# Altium PCB NIXIEclock未铺地.PcbDoc (part 1 of 2)
Units mil, origin at the board's own origin, x right, y up, seen from the top; angles counter-clockwise.
Board outline 8475 x 2960 mil, 2 copper layers (Top Layer, Bottom Layer); 232 components, 292 nets, 854 pads, 200 vias.
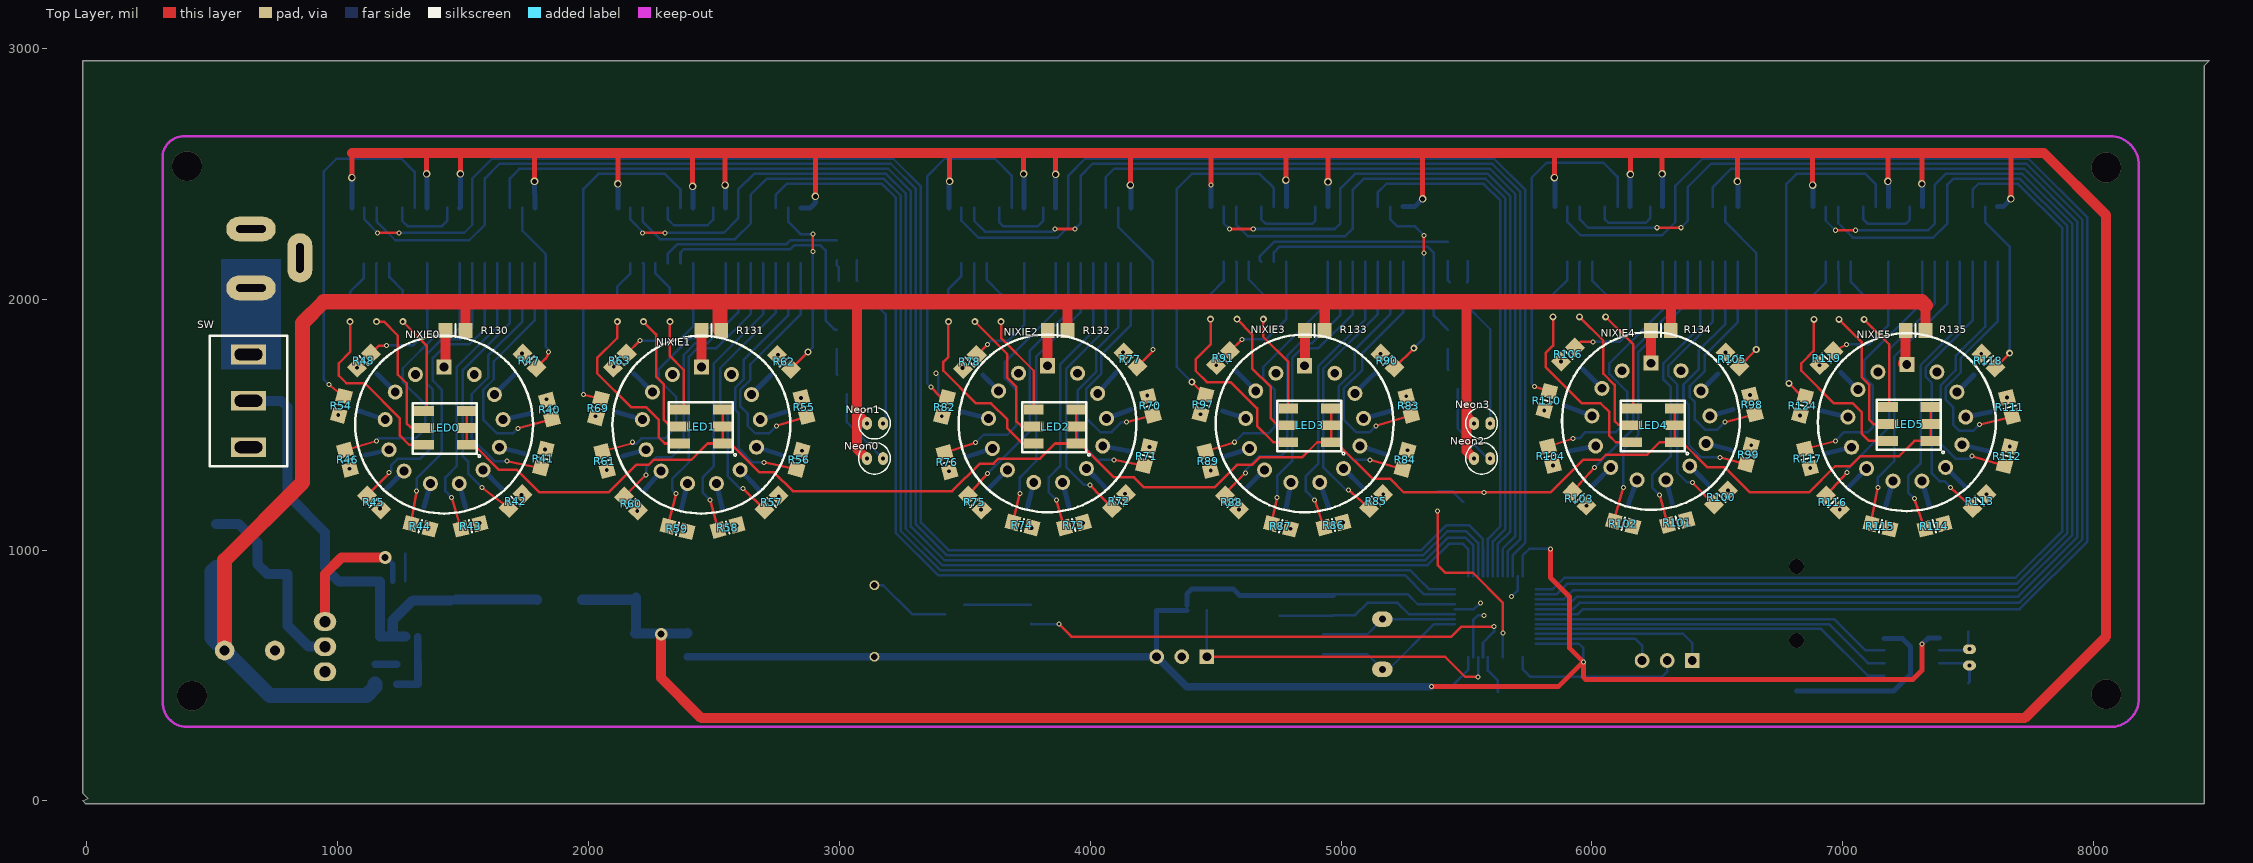
[diagram p0: Top Layer view]
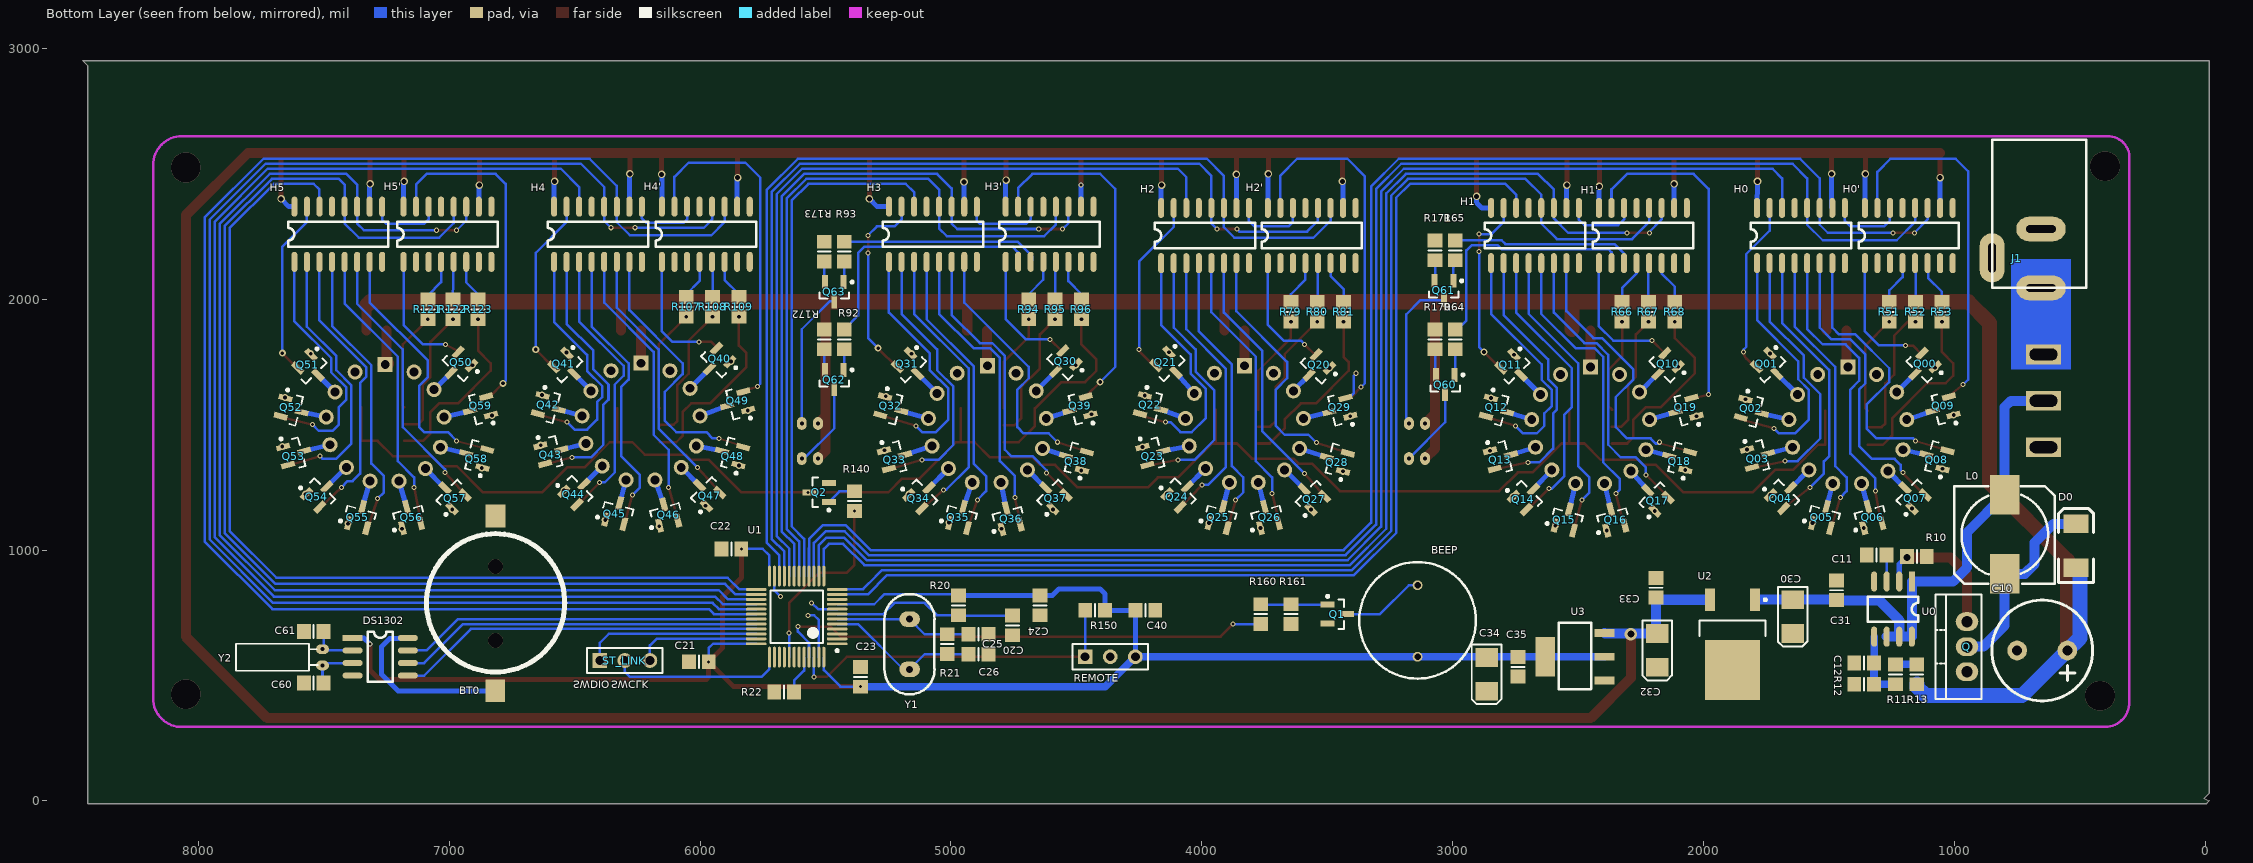
[diagram p1: Bottom Layer view, seen from below]

## Layer stack, top to bottom
Top Layer: signal copper 1.4
Dielectric: dielectric 12.6, FR-4, Dk 4.8
Bottom Layer: signal copper 1.4

## Board outline
-15,0 -5,-10 8440,-10 8440,2930 8460,2950 -15,2950 -15,30 -5,20 5,10

## Design rules (kind name [scope] priority, off if disabled: settings)
Clearance [All] p1: gap=10
ComponentClearance [All] p1: gap=0 collisioncheckmode=3 verticalgap=0 showdistances=FALSE
HoleSize [All] p1: absolutevalues=TRUE maxlimit=200 minlimit=1 maxpercent=80.000 minpercent=20.000
NetAntennae [All] p1: netantennaetolerance=10
PolygonConnect [All] p1: connectstyle=Relief reliefconductorwidth=10 reliefentries=4 polygonreliefangle="90 Angle" airgapwidth=10
RoutingVias [All] p1: holewidth=15 width=30 viastyle="Through Hole" minholewidth=10 minwidth=20 maxholewidth=28 maxwidth=50
SilkToSilkClearance [All] p1: silktosilkclearance=0
SilkToSolderMaskClearance [IsPad] p1: minsilkscreentomaskgap=0 clearancetoexposedcopper=TRUE
SolderMaskExpansion [All] p1: expansion=4
Width [All] p1: maxlimit=100 minlimit=10 preferedwidth=10
23 further rules are at their usual default settings.

## Components (designator, comment, footprint, x,y, rotation, side; value= is the part's Value field where it differs from the comment)
BEEP "Speaker" didi 3140,720 r90 bottom
BT0 "Battery" CR1220 6815,640 r90 bottom
C10 "250V" 1000UF 550,600 r0 bottom
C11 "Cap" 0805_M 1310,980 r0 bottom
C12 "Cap" 0805_M 1360,550 r180 bottom
C20 "Cap Semi" 0805_M 4755,700 r90 bottom
C21 "Cap Semi" 0805_M 6005,555 r180 bottom
C22 "Cap Semi" 0805_M 5875,1005 r180 bottom
C23 "Cap Semi" 0805_M 5360,495 r270 bottom
C24 "Cap Semi" 0805_M 4645,780 r90 bottom
C25 "CAP" 0805_M 4890,665 r0 bottom
C26 "CAP" 0805_M 4890,585 r0 bottom
C30 "Cap Pol1" 3528 1645,735 r270 bottom
C31 "104" 0805_M 1470,840 r270 bottom
C32 "Cap Pol1" 3528 2185,600 r270 bottom
C33 "Cap Semi" 0805_M 2190,850 r270 bottom
C34 "Cap Pol1" 3528 2865,505 r270 bottom
C35 "Cap Semi" 0805_M 2740,535 r90 bottom
C40 "Cap" 0805_M 4225,760 r0 bottom
C60 "Cap" 0805_M 7540,470 r0 bottom
C61 "Cap" 0805_M 7540,675 r0 bottom
D0 "SS14" 7227 515,930 r90 bottom
DS1302 "DS1302" SO-8 7385,650 r180 bottom
H0 "74HC595" SO-16 1615,2130 r90 bottom
H0' "74HC595" SO-16 1185,2130 r90 bottom
H1 "74HC595" SO-16 2675,2130 r90 bottom
H1' "74HC595" SO-16 2245,2130 r90 bottom
H2 "74HC595" SO-16 3990,2130 r90 bottom
H2' "74HC595" SO-16 3565,2130 r90 bottom
H3 "74HC595" SO-16 5075,2135 r90 bottom
H3' "74HC595" SO-16 4610,2135 r90 bottom
H4 "74HC595" SO-16 6410,2135 r90 bottom
H4' "74HC595" SO-16 5980,2135 r90 bottom
H5 "74HC595" SO-16 7445,2135 r90 bottom
H5' "74HC595" SO-16 7010,2135 r90 bottom
J1 "JK" POWER 475,2635 r0 bottom
L0 "L" L101 795,1055 r90 bottom
LED0 "LED.RGB" 5050LED 1335,1385 r0 top
LED1 "LED.RGB" 5050LED 2355,1390 r0 top
LED2 "LED.RGB" 5050LED 3765,1390 r0 top
LED3 "LED.RGB" 5050LED 4780,1395 r0 top
LED4 "LED.RGB" 5050LED 6150,1395 r0 top
LED5 "LED.RGB" 5050LED 7170,1400 r0 top
Neon0 "Neon" NEON 3110,1365 r270 top
Neon1 "Neon" NEON 3110,1505 r270 top
Neon2 "Neon" NEON 5530,1365 r270 top
Neon3 "Neon" NEON 5530,1505 r270 top
NIXIE0 "IN14" IN14 1425,1495 r0 top
NIXIE1 "IN14" IN14 2450,1495 r0 top
NIXIE2 "IN14" IN14 3830,1500 r0 top
NIXIE3 "IN14" IN14 4855,1500 r0 top
NIXIE4 "IN14" IN14 6235,1510 r0 top
NIXIE5 "IN14" IN14 7255,1505 r0 top
Q "IRF630" TO-220 950,615 r90 bottom
Q00 "A42" A42 1130,1730 r315 bottom
Q01 "A42" A42 1735,1730 r225 bottom
Q1 "QNPN" A42 3460,745 r180 bottom
Q02 "A42" A42 1805,1555 r195 bottom
Q2 "QNPN" A42 5525,1230 r0 bottom
Q03 "A42" A42 1780,1375 r165 bottom
Q04 "A42" A42 1680,1220 r135 bottom
Q05 "A42" A42 1520,1135 r105 bottom
Q06 "A42" A42 1335,1135 r75 bottom
Q07 "A42" A42 1170,1220 r45 bottom
Q08 "A42" A42 1075,1370 r15 bottom
Q09 "A42" A42 1050,1565 r345 bottom
Q10 "A42" A42 2155,1730 r315 bottom
Q11 "A42" A42 2755,1725 r225 bottom
Q12 "A42" A42 2820,1560 r195 bottom
Q13 "A42" A42 2805,1370 r165 bottom
Q14 "A42" A42 2705,1215 r135 bottom
Q15 "A42" A42 2545,1125 r105 bottom
Q16 "A42" A42 2360,1125 r75 bottom
Q17 "A42" A42 2195,1210 r45 bottom
Q18 "A42" A42 2100,1365 r15 bottom
Q19 "A42" A42 2075,1560 r345 bottom
Q20 "A42" A42 3545,1725 r315 bottom
Q21 "A42" A42 4130,1735 r225 bottom
Q22 "A42" A42 4200,1570 r195 bottom
Q23 "A42" A42 4190,1385 r165 bottom
Q24 "A42" A42 4085,1225 r135 bottom
Q25 "A42" A42 3925,1135 r105 bottom
Q26 "A42" A42 3740,1135 r75 bottom
Q27 "A42" A42 3565,1215 r45 bottom
Q28 "A42" A42 3465,1360 r15 bottom
Q29 "A42" A42 3455,1560 r345 bottom
Q30 "A42" A42 4555,1740 r315 bottom
Q31 "A42" A42 5160,1730 r225 bottom
Q32 "A42" A42 5235,1565 r195 bottom
Q33 "A42" A42 5220,1370 r165 bottom
Q34 "A42" A42 5115,1220 r135 bottom
Q35 "A42" A42 4960,1135 r105 bottom
Q36 "A42" A42 4770,1130 r75 bottom
Q37 "A42" A42 4595,1220 r45 bottom
Q38 "A42" A42 4505,1365 r15 bottom
Q39 "A42" A42 4490,1565 r345 bottom
Q40 "A42" A42 5935,1750 r315 bottom
Q41 "A42" A42 6530,1730 r225 bottom
Q42 "A42" A42 6600,1570 r195 bottom
Q43 "A42" A42 6590,1390 r165 bottom
Q44 "A42" A42 6490,1235 r135 bottom
Q45 "A42" A42 6330,1150 r105 bottom
Q46 "A42" A42 6135,1145 r75 bottom
Q47 "A42" A42 5975,1230 r45 bottom
Q48 "A42" A42 5875,1385 r15 bottom
Q49 "A42" A42 5855,1585 r345 bottom
Q50 "A42" A42 6965,1735 r315 bottom
Q51 "A42" A42 7550,1725 r225 bottom
Q52 "A42" A42 7625,1560 r195 bottom
Q53 "A42" A42 7615,1385 r165 bottom
Q54 "A42" A42 7515,1225 r135 bottom
Q55 "A42" A42 7355,1135 r105 bottom
Q56 "A42" A42 7160,1135 r75 bottom
Q57 "A42" A42 6990,1220 r45 bottom
Q58 "A42" A42 6895,1375 r15 bottom
Q59 "A42" A42 6880,1565 r345 bottom
Q60 "A42" A42 3030,1660 r270 bottom
Q61 "A42" A42 3035,2035 r270 bottom
Q62 "A42" A42 5465,1680 r270 bottom
Q63 "A42" A42 5465,2030 r270 bottom
R10 "Res1" 0805_M 1150,975 r0 bottom
R11 "Res1" 0805_M 1235,505 r90 bottom
R12 "2K" 0805_M 1360,465 r180 bottom
R13 "Res1" 0805_M 1150,505 r270 bottom
R20 "Res2" 0805_M 4970,780 r270 bottom
R21 "RES" 0805_M 5015,625 r90 bottom
R22 "Res2" 0805_M 5665,435 r0 bottom
R40 "Res1" 0805_M 1845,1560 r105 top
R41 "Res1" 0805_M 1820,1365 r75 top
R42 "Res1" 0805_M 1710,1195 r45 top
R43 "Res1" 0805_M 1530,1095 r15 top
R44 "Res1" 0805_M 1330,1095 r345 top
R45 "Res1" 0805_M 1145,1190 r315 top
R46 "Res1" 0805_M 1040,1360 r285 top
R47 "Res1" 0805_M 1765,1755 r315 top
R48 "Res1" 0805_M 1105,1755 r225 top
R51 "Res1" 0805_M 1260,1950 r270 bottom
R52 "Res1" 0805_M 1155,1950 r270 bottom
R53 "Res1" 0805_M 1050,1950 r270 bottom
R54 "Res1" 0805_M 1015,1575 r75 top
R55 "Res1" 0805_M 2860,1570 r105 top
R56 "Res1" 0805_M 2840,1360 r75 top
R57 "Res1" 0805_M 2730,1190 r45 top
R58 "Res1" 0805_M 2555,1090 r15 top
R59 "Res1" 0805_M 2355,1085 r345 top
R60 "Res1" 0805_M 2170,1185 r315 top
R61 "Res1" 0805_M 2065,1355 r285 top
R62 "Res1" 0805_M 2780,1750 r315 top
R63 "Res1" 0805_M 2125,1755 r225 top
R64 "Res1" 0805_M 2990,1840 r270 bottom
R65 "Res1" 0805_M 2990,2195 r270 bottom
R66 "Res1" 0805_M 2325,1950 r270 bottom
R67 "Res1" 0805_M 2220,1950 r270 bottom
R68 "Res1" 0805_M 2115,1950 r270 bottom
R69 "Res1" 0805_M 2040,1565 r75 top
R70 "Res1" 0805_M 4240,1575 r105 top
R71 "Res1" 0805_M 4225,1375 r75 top
R72 "Res1" 0805_M 4115,1195 r45 top
R73 "Res1" 0805_M 3935,1100 r15 top
R74 "Res1" 0805_M 3730,1100 r345 top
R75 "Res1" 0805_M 3540,1190 r315 top
R76 "Res1" 0805_M 3430,1350 r285 top
R77 "Res1" 0805_M 4160,1760 r315 top
R78 "Res1" 0805_M 3520,1750 r225 top
R79 "Res1" 0805_M 3645,1950 r270 bottom
R80 "Res1" 0805_M 3540,1950 r270 bottom
R81 "Res1" 0805_M 3435,1950 r270 bottom
R82 "Res1" 0805_M 3420,1570 r75 top
R83 "Res1" 0805_M 5270,1575 r105 top
R84 "Res1" 0805_M 5255,1360 r75 top
R85 "Res1" 0805_M 5140,1195 r45 top
R86 "Res1" 0805_M 4970,1100 r15 top
R87 "Res1" 0805_M 4760,1095 r345 top
R88 "Res1" 0805_M 4565,1190 r315 top
R89 "Res1" 0805_M 4470,1355 r285 top
R90 "Res1" 0805_M 5185,1755 r315 top
R91 "Res1" 0805_M 4530,1765 r225 top
R92 "Res1" 0805_M 5425,1840 r270 bottom
R93 "Res1" 0805_M 5425,2190 r270 bottom
R94 "Res1" 0805_M 4690,1960 r270 bottom
R95 "Res1" 0805_M 4585,1960 r270 bottom
R96 "Res1" 0805_M 4480,1960 r270 bottom
R97 "Res1" 0805_M 4450,1580 r75 top
R98 "Res1" 0805_M 6640,1580 r105 top
R99 "Res1" 0805_M 6625,1380 r75 top
R100 "Res1" 0805_M 6515,1210 r45 top
R101 "Res1" 0805_M 6340,1110 r15 top
R102 "Res1" 0805_M 6125,1105 r345 top
R103 "Res1" 0805_M 5950,1205 r315 top
R104 "Res1" 0805_M 5835,1375 r285 top
R105 "Res1" 0805_M 6560,1760 r315 top
R106 "Res1" 0805_M 5905,1780 r225 top
R107 "Res1" 0805_M 6055,1970 r270 bottom
R108 "Res1" 0805_M 5950,1970 r270 bottom
R109 "Res1" 0805_M 5845,1970 r270 bottom
R110 "Res1" 0805_M 5820,1595 r75 top
R111 "Res1" 0805_M 7665,1570 r105 top
R112 "Res1" 0805_M 7655,1375 r75 top
R113 "Res1" 0805_M 7545,1195 r45 top
R114 "Res1" 0805_M 7365,1095 r15 top
R115 "Res1" 0805_M 7150,1095 r345 top
R116 "Res1" 0805_M 6960,1190 r315 top
R117 "Res1" 0805_M 6860,1365 r285 top
R118 "Res1" 0805_M 7580,1755 r315 top
R119 "Res1" 0805_M 6935,1765 r225 top
R121 "Res1" 0805_M 7085,1960 r270 bottom
R122 "Res1" 0805_M 6985,1960 r270 bottom
R123 "Res1" 0805_M 6885,1960 r270 bottom
R124 "Res1" 0805_M 6840,1575 r75 top
R130 "Res1" 0805_M 1470,1875 r0 top
R131 "Res1" 0805_M 2490,1875 r0 top
R132 "Res1" 0805_M 3870,1875 r0 top
R133 "Res1" 0805_M 4895,1875 r0 top
R134 "Res1" 0805_M 6275,1875 r0 top
R135 "Res1" 0805_M 7290,1875 r0 top
R140 "Res1" 0805_M 5385,1195 r270 bottom
R150 "Res1" 0805_M 4425,760 r0 bottom
R160 "Res2" 0805_M 3765,745 r90 bottom
R161 "Res2" 0805_M 3645,745 r90 bottom
R170 "Res1" 0805_M 3070,1840 r90 bottom
R171 "Res1" 0805_M 3070,2195 r90 bottom
R172 "Res1" 0805_M 5505,1840 r90 bottom
R173 "Res1" 0805_M 5505,2190 r90 bottom
REMOTE "REMOTE" HDR1X3 4465,575 r180 bottom
ST_LINK "ST_LINK" HDR1X3 6400,560 r180 bottom
SW "SW-SPDT" SW 800,1335 r90 top
U0 "MC34063" SO-8 1170,875 r270 bottom
U1 "STM32F100C8T6BTR" LQFP48_M 5615,735 r0 bottom
U2 "78L05_1" "78M05 DPAK TO-225" 1885,625 r270 bottom
U3 "LM1117-3.3V" 1117 2395,480 r90 bottom
Y1 "8M" XTAL 5165,625 r270 bottom
Y2 "XTAL" X32768 7505,605 r0 bottom

## Footprints (in the part's own frame and the unit in brackets; to place one, negate y for a bottom-side part, rotate by r counter-clockwise, add the part's x,y. Pads: shape width x height; smd on the part's side, far side on the other; paste and mask are expansions set on the pad)
"78M05 DPAK TO-225" [mm] "D-PAK, 3-Pads, Body 6.20x6.72mm (max), IPC Medium Density"
  rect 2.3x1 smd: 1(-4.5,-2.28) 3(-4.5,2.28)
  rect 6.1x5.55 smd: 2(2.6,0)
  silkscreen extent -4.62,-3.35 -0.85,3.45, body extent -2.4,-3.35 3.8,3.35, height 2.38
0805_M [mm] "Chip Resistor, Body 2.0x1.2mm, IPC Low Density"
  rect 1.4x1.5 smd: 1(-1,0) 2(1,0)
  silkscreen extent 0,-0.65 0,0.65, body extent -1.07,-0.7 1.07,0.7, height 0.7
1000UF [mm]
  round 2 hole 1: 1(0,0) 2(5.08,0)
  silkscreen extent -2.56,-5.1 7.64,5.1
1117 [mm]
  rect 0.8x2 smd: 1(0.009,-0.004) 2(2.409,-0.004) 3(4.809,-0.004)
  rect 4x2 smd: 4(2.409,5.996)
  silkscreen extent -0.89,1.35 5.86,4.65
3528 [mm]
  rect 1.9x2.28 smd: 1(-1.71,0) 2(1.71,0)
  silkscreen extent -3.02,-1.5 3.02,1.5
5050LED [mil]
  rect 78.74x39.37 smd: 1(10,170) 2(10,102.5) 3(10,35) 4(180,35) 5(180,102.5) 6(180,170)
  silkscreen extent -35,-15 235,200
7227 [mil]
  rect 75x100 smd: 1(175,0) 2(0,0)
  silkscreen extent -60,-70 235,70
A42 [mm] "SOT23, 3-Leads, Body 2.90x2.40mm, Pitch 0.95mm, IPC Medium Density"
  rect 1.4x0.6 smd: 1(0.975,0) 2(-0.975,0.95) 3(-0.975,-0.95)
  silkscreen extent -1.1,-1.5 0.7,1.92, body extent -0.7,-1.5 0.7,1.5, height 1.15
CR1220 [mm]
  rect 2.3x2 smd: 1(-5.1,0.025) 2(12.6,0)
  silkscreen extent -3.19,-7 10.81,7
didi [mm]
  round 1 hole 0.65: 1(-3.683,0) 2(3.556,0)
  silkscreen extent -5.9,-5.9 5.9,5.9
HDR1X3 [mm] "Connector; Header; 3 Position"
  rect 1.5x1.5 hole 0.9: 1(0,0)
  round 1.5 hole 0.9: 2(2.54,0) 3(5.08,0)
  silkscreen extent -1.27,-1.27 6.35,1.27
IN14 [mil]
  rect 60x60 hole 35.43: a(0,235)
  round 60 hole 35.43: b(120,205) c(200,125) d(235,25) e(220,-85) f(155,-175) g(60,-230) h(-55,-230) i(-160,-180) j(-220,-95) k(-235,25) l(-195,135) m(-115,205)
  silkscreen extent -354,-349 354,359
L101 [mm]
  rect 4x3 smd: 1(-3.797,0.124) 2(4.203,0.124)
  silkscreen extent -4.83,-4.95 5.08,5.21
LQFP48_M [mm] "Thin QFP, 48-Leads, Body 7x7mm, Pitch 0.5mm, IPC Low Density"
  oval 2.1x0.3 smd: 1(-4.1,2.75) 2(-4.1,2.25) 3(-4.1,1.75) 4(-4.1,1.25) 5(-4.1,0.75) 6(-4.1,0.25) 7(-4.1,-0.25) 8(-4.1,-0.75) 9(-4.1,-1.25) 10(-4.1,-1.75) 11(-4.1,-2.25) 12(-4.1,-2.75) 25(4.1,-2.75) 26(4.1,-2.25) 27(4.1,-1.75) 28(4.1,-1.25) 29(4.1,-0.75) 30(4.1,-0.25) 31(4.1,0.25) 32(4.1,0.75) 33(4.1,1.25) 34(4.1,1.75) 35(4.1,2.25) 36(4.1,2.75)
  oval 0.3x2.1 smd: 13(-2.75,-4.1) 14(-2.25,-4.1) 15(-1.75,-4.1) 16(-1.25,-4.1) 17(-0.75,-4.1) 18(-0.25,-4.1) 19(0.25,-4.1) 20(0.75,-4.1) 21(1.25,-4.1) 22(1.75,-4.1) 23(2.25,-4.1) 24(2.75,-4.1) 37(2.75,4.1) 38(2.25,4.1) 39(1.75,4.1) 40(1.25,4.1) 41(0.75,4.1) 42(0.25,4.1) 43(-0.25,4.1) 44(-0.75,4.1) 45(-1.25,4.1) 46(-1.75,4.1) 47(-2.25,4.1) 48(-2.75,4.1)
  silkscreen extent -4.22,-2.65 2.65,3.57, body extent -3.5,-3.5 3.5,3.5, height 1.6
NEON [mm]
  oval 1.3x1 hole 0.4: 1(0,0) 2(0,1.64)
  silkscreen extent -1.62,-0.84 1.57,2.36
POWER [mil]
  oval 196.85x98.43 hole 30 slot 118.11 at 0 deg: 1(180,590) 2(180,355)
  oval 98.43x196.85 hole 30 slot 118.11 at 90 deg: 3(375,470)
  silkscreen extent 0,0 375,590
SO-8 [mil]
  rect 80x24 smd: 1(0,0)
  oval 80x24 smd: 2(0,-50) 3(0,-100) 4(0,-150) 5(220,-150) 6(220,-100) 7(220,-50) 8(220,0)
  silkscreen extent 60,-175 160,25
SO-16 [mil]
  oval 80x24 smd: 1(14,172) 2(14,122) 3(14,72) 4(14,22) 5(14,-28) 6(14,-78) 7(14,-128) 8(14,-178) 9(234,-178) 10(234,-128) 11(234,-78) 12(234,-28) 13(234,22) 14(234,72) 15(234,122) 16(234,172)
  silkscreen extent 74,-203 174,197
SW [mm]
  rect 2x3.5 hole 1.2 slot 2.8 at 90 deg: 1(1.905,3.937) 2(6.604,3.937) 3(11.303,3.937)
  silkscreen extent 0,0 13.21,7.87
TO-220 [mil]
  oval 75x90 hole 45: 1(-100,0) 2(0,0) 3(100,0)
  silkscreen extent -208,-58 208,125
X32768 [mm]
  oval 1.3x1 hole 0.4: 1(0,0) 2(0,1.64)
  silkscreen extent 0.51,-0.56 8.77,2.17
XTAL [mil]
  oval 62x82 hole 28: 1(-100,0) 2(100,0)
  silkscreen extent -200,-100 200,100

## Part data
BEEP: "Loudspeaker"
BT0: "Multicell Battery"
C10: library part "Cap Pol1", "Polarized Capacitor (Radial)"
C11 C12 C40 C60 C61: "Capacitor"
C20 C21 C22 C23 C24 C33 C35: "Capacitor (Semiconductor SIM Model)"
C30 C32 C34: "Polarized Capacitor (Radial)"
C31: library part CAP, "Capacitor"
D0: library part "Diode 18TQ045", "Schottky Rectifier"
DS1302: library part Component_3
L0: library part "Inductor Iron", "Magnetic-Core Inductor"
Neon0 Neon1 Neon2 Neon3: "Neon Bulb"
Q: library part MOSFET-N, "N-Channel MOSFET"
Q00 Q01 Q02 Q03 Q04 Q05 Q06 Q07 Q08 Q09 Q10 Q11 Q12 Q13 Q14 Q15 Q16 Q17 Q18 Q19 Q20 Q21 Q22 Q23 Q24 Q25 Q26 Q27 Q28 Q29 Q30 Q31 Q32 Q33 Q34 Q35 Q36 Q37 Q38 Q39 Q40 Q41 Q42 Q43 Q44 Q45 Q46 Q47 Q48 Q49 Q50 Q51 Q52 Q53 Q54 Q55 Q56 Q57 Q58 Q59 Q60 Q61 Q62 Q63: library part QNPN, "NPN Bipolar Transistor"
Q1 Q2: "NPN Bipolar Transistor"
R10 R11 R13 R20 R22 R40 R41 R42 R43 R44 R45 R46 R47 R48 R51 R52 R53 R54 R55 R56 R57 R58 R59 R60 R61 R62 R63 R64 R65 R66 R67 R68 R69 R70 R71 R72 R73 R74 R75 R76 R77 R78 R79 R80 R81 R82 R83 R84 R85 R86 R87 R88 R89 R90 R91 R92 R93 R94 R95 R96 R97 R98 R99 R100 R101 R102 R103 R104 R105 R106 R107 R108 R109 R110 R111 R112 R113 R114 R115 R116 R117 R118 R119 R121 R122 R123 R124 R130 R131 R132 R133 R134 R135 R140 R150 R160 R161 R170 R171 R172 R173: "Resistor"
R12: library part Res1, "Resistor"
SW: "SPDT Subminiature Toggle Switch, Right Angle Mounting, Vertical Actuation"
U1: "STM32 ARM-based 32-bit MCU Value Line with 64 kB Flash, 8 kB Internal RAM, Internal Code B, -40 to +85癈 Temperature, 48-Pin LQFP, Tape and Reel"
U3: library part 1117-5.0
Y1: library part XTAL, "Crystal Oscillator"
Y2: "Crystal Oscillator"

## Via types
v1: diameter 20, hole 12, Top Layer to Bottom Layer, 85 vias
v2: diameter 28, hole 15, Top Layer to Bottom Layer, 84 vias
v3: diameter 30, hole 20, Top Layer to Bottom Layer, 23 vias
v4: diameter 118.11, hole 118.11, Top Layer to Bottom Layer, 4 vias
v5: diameter 50, hole 28, Top Layer to Bottom Layer, 2 vias
v6: diameter 59.06, hole 59.06, Top Layer to Bottom Layer, 2 vias

## Nets (pads, with @x,y where several pads share a name; then routed paths per layer and width w, separated by ;. In a path a pad name is that pad's centre, name@x,y a point inside that pad or via, vN(x,y) a via of type N, cw(c..) or ccw(c..) an arc to the next point about the centre after c; other vN are vias at no path point)
595.DATA0: H0.14 U1.14 | length 5575.4
  Bottom Layer w10: H0.14@1687,2364 1687,2482 1725,2520 3195,2520 3285,2430 3285,1093.43 3418.43,960 5336.57,960 5426.57,1050 5496.1,1050 5526.42,1019.69 U1.14@5526.42,896.42
595.DATA1: H1.14 U1.11 | length 4238.2
  Bottom Layer w10: H1.14@2747,2364 2747,2417 2790,2460 3170.15,2460 3225,2405.15 3225,1068.58 3393.58,900 5255,900 5331.42,823.58 U1.11@5453.58,823.58
595.DATA2: H2.14 U1.20 | length 3355.2
  Bottom Layer w10: H2.14@4062,2364 4062,2487 4095,2520 5593.43,2520 5695,2418.43 5695,1056.57 5643.9,1005.47 5644.53,1004.84 U1.20@5644.53,896.42
595.DATA3: H3.14 U1.17 | length 2105.1
  Bottom Layer w10: H3.14@5147,2369 5147,2427 5180,2460 5568.58,2460 5635,2393.58 5635,1095 5585,1045 ; U1.17@5585.47,896.42 5585.47,1045
595.DATA4: H4.14 U1.28 | length 5175.1
  Bottom Layer w10: U1.28@5776.42,784.21 5909.21,784.21 5940,815 7698.43,815 7935,1051.57 7935,2308.43 7723.43,2520 6555,2520 6482,2447 H4.14@6482,2369
595.DATA5: H5.14 U1.25 | length 3910.9
  Bottom Layer w10: U1.25@5776.42,843.27 5843.27,843.27 5890,890 7688.58,890 7875,1076.42 7875,2283.58 7698.58,2460 7540,2460 7517,2437 H5.14@7517,2369
595.SHCP0: H0'.11 H0.11 U1.16 | length 6403.1
  Top Layer w10: v1(1160,2265) v1(1245,2265)
  Bottom Layer w10: H0'.11@1107,2364 1107,2318 v1(1160,2265) ; v1(1245,2265) 1505,2265 1537,2297 H0.11@1537,2364 1537,2482 1615,2560 3215,2560 3325,2450 3325,1110 3435,1000 5320,1000 5420,1100 5510,1100 5565.47,1044.53 5565.47,1007.33 ; 5565.47,1005 5565.47,1007.33 ; U1.16@5565.79,896.42 5565.79,1007.01 5565.47,1007.33
595.SHCP1: H1'.11 H1.11 U1.13 | length 5163.4
  Top Layer w10: v1(2215,2265) v1(2305,2265)
  Bottom Layer w10: H1'.11@2167,2364 2167,2318 2220,2265 v1(2215,2265) ; v1(2305,2265) 2540,2265 2597,2322 H1.11@2597,2364 2597,2437 2660,2500 3186.72,2500 3265,2421.72 3265,1085.15 3410.15,940 5345,940 5430,1025 5486.42,1025 5506.73,1004.68 U1.13@5506.73,896.42
595.SHCP2: H2'.11 H2.11 U1.22 | length 4189.3
  Bottom Layer w10: H2'.11@3487,2364 3487,2313 3555,2245 3870,2245 3912,2287 H2.11@3912,2364 3912,2492 3980,2560 5610,2560 5735,2435 5735,1030 5683.9,978.9 U1.22@5683.9,896.42
595.SHCP3: H3'.11 H3.11 U1.19 | length 2964.2
  Top Layer w10: v1(4555,2280) v1(4650,2280)
  Bottom Layer w10: H3'.11@4532,2369 4532,2303 v1(4555,2280) ; v1(4650,2280) 4975,2280 4997,2302 H3.11@4997,2369 4997,2442 5055,2500 5585.15,2500 5675,2410.15 5675,1075 5623.9,1023.9 5624.84,1022.95 U1.19@5624.84,896.42
595.SHCP4: H4'.11 H4.11 U1.30 | length 6073.3
  Bottom Layer w10: U1.30@5776.42,744.84 5944.84,744.84 5965,765 7705,765 7975,1035 7975,2325 7740,2560 6440,2560 6332,2452 H4.11@6332,2369 6332,2307 6280,2255 5955,2255 5902,2308 H4'.11@5902,2369
595.SHCP5: H5'.11 H5.11 U1.27 | length 4806.4
  Top Layer w10: v1(6970,2275) v1(7050,2275)
  Bottom Layer w10: U1.27@5776.42,803.9 5888.9,803.9 5925,840 7695.15,840 7915,1059.85 7915,2300.15 7715.15,2500 7410,2500 7367,2457 H5.11@7367,2369 7367,2302 7340,2275 v1(7050,2275) ; H5'.11@6932,2369 6932,2313 v1(6970,2275)
595.STCP0: H0'.12 H0.12 U1.15 | length 6331.1
  Bottom Layer w10: H0'.12@1157,2364 1157,2308 1230,2235 1525,2235 1587,2297 H0.12@1587,2364 1587,2482 1645,2540 3205,2540 3305,2440 3305,1101.72 3426.72,980 5328.28,980 5423.28,1075 5500,1075 5546.1,1028.9 U1.15@5546.1,896.42
595.STCP1: H1'.12 H1.12 U1.12 | length 4944.9
  Bottom Layer w10: H1'.12@2217,2364 2217,2308 2285,2240 2585,2240 2647,2302 H1.12@2647,2364 2647,2417 2710,2480 3178.43,2480 3245,2413.43 3245,1076.86 3401.86,920 5275,920 5327.5,867.5 ; 5330,865 5350,845 5451.85,845 U1.12@5453.58,843.27
595.STCP2: H2'.12 H2.12 U1.21 | length 4071.3
  Top Layer w10: v1(3860,2280) v1(3940,2280)
  Bottom Layer w10: H2'.12@3537,2364 3537,2313 3580,2270 3850,2270 v1(3860,2280) ; v1(3940,2280) 3962,2302 H2.12@3962,2364 ; H2.12@3960,2362 H2.12@3962,2364 ; U1.21@5664.21,896.42 5664.21,993.58 5663.9,993.9 5715,1045 5715,2426.72 5601.72,2540 4010,2540 3962,2492 H2.12@3962,2364
595.STCP3: H3'.12 H3.12 U1.18 | length 2907.6
  Bottom Layer w10: H3'.12@4582,2369 4582,2298 4629,2251 5016,2251 5047,2282 H3.12@5047,2369 5047,2437 5090,2480 5576.86,2480 5655,2401.86 5655,1085 5605.16,1035.16 U1.18@5605.16,896.42
595.STCP4: H4'.12 H4.12 U1.29 | length 5912.3
  Top Layer w10: v1(6260,2285) v1(6355,2285)
  Bottom Layer w10: U1.29@5776.42,764.53 5924.53,764.53 5950,790 7701.72,790 7955,1043.28 7955,2316.72 7731.72,2540 6475,2540 6382,2447 H4.12@6382,2369 6382,2312 v1(6355,2285) ; H4'.12@5952,2369 5952,2318 5985,2285 v1(6260,2285)
595.STCP5: H5'.12 H5.12 U1.26 | length 4712.7
  Bottom Layer w10: U1.26@5776.42,823.58 5858.58,823.58 5900,865 7691.86,865 7895,1068.14 7895,2291.86 7706.86,2480 7440,2480 7417,2457 H5.12@7417,2369 7417,2302 7360,2245 7040,2245 6982,2303 H5'.12@6982,2369
1302.CLK: DS1302.7 U1.31 | length 1440.4
  Bottom Layer w10: U1.31@5776.42,725.16 6964.84,725.16 7090,600 DS1302.7@7165,600
1302.DATA: DS1302.6 U1.32 | length 1452.9
  Bottom Layer w10: U1.32@5776.42,705.47 6940,705.47 ; 6940,705.16 6944.84,705.16 7100,550 DS1302.6@7165,550
1302.RST: DS1302.5 U1.33 | length 1465.5
  Bottom Layer w10: U1.33@5776.42,685.79 6913.58,685.79 7099.37,500 DS1302.5@7165,500
+3.3V: BEEP.1 C21.2 C22.2 C23.2 C24.2 C34.1 C35.2 C40.2 DS1302.1 R20.1 R150.1 REMOTE.3 U1.9 U1.24 U1.36 U1.48 U3.2 U3.4 | length 7919.5
  Top Layer w10: v1@5835,1004.37 v1(5835.63,1005)
  Top Layer w20: v1(5360,455.63) 5866.26,455.63 v1(5965.63,555) ; v1@5835,1004.37 5835,890 5910,815 5910,610.63 v1(5965.63,555) ; v1(7315,625) 7315,520 7280,485 5975,485 5965.63,494.37 v1(5965.63,555)
  Bottom Layer w10: R20.1@4970,819.37 4975.63,825 5265,825 5305.79,784.21 U1.9@5453.58,784.21 ; v1(5360,455.63) 5440.63,455.63 5506.73,521.73 U1.48@5506.73,573.58 ; U1.24@5723.27,896.42 5723.27,978.27 5750,1005 v1(5835.63,1005) ; U1.36@5776.42,626.73 5948.27,626.73 5965.63,609.37 v1(5965.63,555)
  Bottom Layer w20: REMOTE.3@4264.37,575.63 C40.2@4264.37,760 R150.1@4385.63,760 ; R150.1@4385.63,780 4385.63,825.63 4405,845 4570,845 4595.63,819.37 C24.2@4645,819.37 R20.1@4970,819.37 ; v1(7315,625) 7340,650 DS1302.1@7385,650
  Bottom Layer w30: U3.2@2394.35,574.37 U3.2@2394.83,574.85 U3.4@2631.05,574.85 3139.85,574.85 BEEP.1@3140,575 ; BEEP.1@3140,574.85 4130,574.85 ; 4130.15,575 REMOTE.3@4265,575 4385,455 C23.2@5360,455
+5.0V: C32.1 C33.2 H0'.10 H0'.16 H0.10 H0.16 H1'.10 H1'.16 H1.10 H1.16 H2'.10 H2'.16 H2.10 H2.16 H3'.10 H3'.16 H3.10 H3.16 H4'.10 H4'.16 H4.10 H4.16 H5'.10 H5'.16 H5.10 H5.16 U2.1 U3.3 | length 20833.3
  Top Layer w20: v3(1057,2485) 1057,2582.61 ; v3(1355,2500) 1355,2582.61 ; v3(1490,2500) 1490,2582.61 ; v3(1785,2470) 1785,2582.61 ; 2115,2582.61 2117,2580.61 v3(2117,2460) ; v3(2415,2450) 2415,2582.61 ; v3(2545,2455) 2545,2582.61 ; v3(2905,2410) 2905,2582.61 ; v3(3440,2470) 3440,2582.61 ; v3(3735,2500) 3735,2582.61 ; 3860,2582.61 3862,2580.61 v3(3862,2498) ; v3(4160,2455) 4160,2577.61 4165,2582.61 ; v1(4482,2455) 4482,2579.61 4485,2582.61 ; v3(4780,2475) 4780,2582.61 ; v3(4948,2468) 4948,2580.61 4950,2582.61 ; v3(5325,2400) 5325,2582.61 ; v3(5850,2485) 5850,2582.61 ; v3(6153,2498) 6153,2580.61 6155,2582.61 ; v3(6280,2500) 6280,2582.61 ; v3(6580,2470) 6580,2582.61 ; v3(6880,2455) 6880,2582.61 ; v3(7180,2470) 7180,2582.61 ; v3(7315,2460) 7315,2582.61 ; v3(7670,2400) 7670,2582.61
  Top Layer w40: 1057,2582.61 1355,2582.61 1490,2582.61 1785,2582.61 2115,2582.61 2415,2582.61 2545,2582.61 2905,2582.61 3440,2582.61 3735,2582.61 3860,2582.61 4165,2582.61 4485,2582.61 4780,2582.61 4950,2582.61 5325,2582.61 5850,2582.61 6155,2582.61 6280,2582.61 6580,2582.61 6880,2582.61 7180,2582.61 7315,2582.61 7670,2582.61 7802.39,2582.61 8050,2335 8050,655 7725,330 2450,330 2290,490 v5(2290,665)
  Bottom Layer w20: H0'.10@1057,2364 v3(1057,2485) ; v3(1355,2500) 1357,2498 H0'.16@1357,2364 ; H0.10@1487,2364 1490,2367 v3(1490,2500) ; v3(1785,2470) H0.16@1787,2364 ; H1'.10@2117,2364 v3(2117,2460) ; v3(2415,2450) 2417,2448 H1'.16@2417,2364 ; v3(2545,2455) 2547,2453 H1.10@2547,2364 ; H1.16@2847,2364 2884,2364 2905,2385 v3(2905,2410) ; H2'.10@3437,2364 3437,2467 v3(3440,2470) ; v3(3735,2500) 3737,2498 H2'.16@3737,2364 ; H2.10@3862,2364 v3(3862,2498) ; v3(4160,2455) 4162,2453 H2.16@4162,2364 ; H3'.10@4482,2369 v1(4482,2455) ; v3(4780,2475) 4782,2473 H3'.16@4782,2369 ; H3.10@4947,2369 4947,2468 v3(4948,2468) ; H3.16@5247,2369 5294,2369 v3(5325,2400) ; v3(5850,2485) 5852,2483 H4'.10@5852,2369 ; H4'.16@6152,2369 6152,2498 v3(6153,2498) ; v3(6280,2500) 6282,2498 H4.10@6282,2369 ; v3(6580,2470) 6582,2468 H4.16@6582,2369 ; v3(6880,2455) 6882,2453 H5'.10@6882,2369 ; v3(7180,2470) 7182,2468 H5'.16@7182,2369 ; v3(7315,2460) 7317,2458 H5.10@7317,2369 ; H5.16@7617,2369 7639,2369 v3(7670,2400)
  Bottom Layer w40: U2.1@1974.76,802.17 2181.54,802.17 C33.2@2190,810.63 C32.1@2190,667.32 ; C32.1@2185,667.32 C32.1@2190,667.32 ; v5(2290,665) 2287.68,667.32 C32.1@2190,667.32 ; v5@2290,667.32 2392.81,667.32 U3.3@2394.83,669.34
+12V: C30.1 C31.2 L0.2 SW.2 U0.1 U0.6 U0.7 U0.8 U2.3 | length 2062
  Bottom Layer w40: SW.2@645,1595 775,1595 800,1570 800,1220.35 950,1070.35 950,930 1005,875 ; 1010,875 1155,875 ; U0.1@1170,875 U0.8@1170,655 U0.7@1220,655 ; U0.6@1270,655 U0.7@1220,655 ; C31.2@1450,800 1300,800 1220,720 U0.7@1220,655 ; C31.2@1471.69,802.32 C30.1@1645,802.32 1795.08,802.32 U2.3@1795.24,802.17
+170V: C10.1 D0.2 Neon0.1 Neon1.1 Neon2.1 Neon3.1 R13.2 R130.2 R131.2 R132.2 R133.2 R134.2 R135.2 | length 11046.9
  Top Layer w40: R130.2@1510,1875.63 1510,1990 ; 3070,1990 3070,1545 ; Neon0.1@3110,1365 3070,1405 3070,1545 ; Neon1.1@3110,1505 3070,1545 ; R132.2@3910,1875.63 3910,1990 ; R133.2@4935,1875.63 4935,1990 ; 5500,1990 5500,1535 ; Neon2.1@5530,1365 5500,1395 5500,1535 ; Neon3.1@5530,1505 5500,1535 ; R134.2@6315,1875.63 6315,1990 ; R135.2@7330,1875.63 7330,1975
  Top Layer w60: C10.1@550,600 550,960 860,1270 860,1905 945,1990 1510,1990 2525,1990 ; R131.2@2525,1879.37 2525,1990 ; 7330,1975 7315,1990 6315,1990 5500,1990 4935,1990 3910,1990 3070,1990 2525,1990
  Bottom Layer w60: D0.2@515,930 500,915 500,650 C10.1@550,600 730,420 1115,420 1150,455 R13.2@1150,465.63
BEEP: R160.1 U1.45 | length 2022.3
  Top Layer w10: v1(3875,705) 3925,655 4515.27,655 5440,655 5480,695 v1(5610,695)
  Bottom Layer w10: R160.1@3765,705.63 3765.63,705 v1(3875,705) ; U1.45@5565.79,573.58 5565.79,630.79 5610,675 v1(5610,695)
BREATHCMD: LED0.4 LED0.5 LED0.6 LED1.4 LED1.5 LED1.6 LED2.4 LED2.5 LED2.6 LED3.4 LED3.5 LED3.6 LED4.4 LED4.5 LED4.6 LED5.4 LED5.5 LED5.6 Q2.1 | length 7442.4
  Top Layer w10: LED0.6@1515,1555 LED0.5@1515,1487.5 LED0.4@1515,1420 1543.64,1420 1643.64,1320 1715,1320 1805,1230 2080,1230 2190,1340 2240,1340 2260,1360 2410,1360 2475,1425 LED1.4@2535,1425 ; LED1.6@2535,1560 LED1.5@2535,1492.5 LED1.4@2535,1425 ; LED2.6@3945,1560 LED2.5@3945,1492.5 LED2.4@3945,1425 ; LED3.6@4960,1565 LED3.5@4960,1497.5 LED3.4@4960,1430 ; LED4.6@6330,1565 LED4.5@6330,1497.5 LED4.4@6330,1430 ; LED5.6@7350,1570 LED5.5@7350,1502.5 LED5.4@7350,1435 7285,1435 7225,1375 7070,1375 7030,1335 6970,1335 6865,1230 6630,1230 6530,1330 6460,1330 6360,1430 LED4.4@6330,1430 ; LED1.4@2535,1425 2566.1,1425 2681.1,1310 2740,1310 2815,1235 3450,1235 3560,1345 3615,1345 3635,1365 3800,1365 3860,1425 LED2.4@3945,1425 ; LED2.4@3945,1425 3960,1425 4095,1290 4175,1290 4215,1250 4495,1250 4585,1340 4645,1340 4675,1370 4845,1370 4905,1430 LED3.4@4960,1430 ; LED3.4@4960,1430 4980,1430 5125,1285 5195,1285 5250,1230 v1(5570,1230) 5835,1230 5965,1360 6035,1360 6055,1380 6220,1380 6270,1430 LED4.4@6330,1430
GND: BT0.2 C10.2 C11.2 C12.1 C20.1 C21.1 C22.1 C23.1 C24.1 C25.1 C26.1 C30.2 C31.1 C32.2 C33.1 C34.2 C35.1 C40.1 C60.2 C61.2 DS1302.4 H0'.8 H0'.13 H0.8 H0.13 H1'.8 H1'.13 H1.8 H1.13 H2'.8 H2'.13 H2.8 H2.13 H3'.8 H3'.13 H3.8 H3.13 H4'.8 H4'.13 H4.8 H4.13 H5'.8 H5'.13 H5.8 H5.13 J1.2 Q00.3 Q01.3 Q1.3 Q2.3 Q02.3 Q03.3 Q04.3 Q05.3 Q06.3 Q07.3 Q08.3 Q09.3 Q10.3 Q11.3 Q12.3 Q13.3 Q14.3 Q15.3 Q16.3 Q17.3 Q18.3 Q19.3 Q20.3 Q21.3 Q22.3 Q23.3 Q24.3 Q25.3 Q26.3 Q27.3 Q28.3 Q29.3 Q30.3 Q31.3 Q32.3 Q33.3 Q34.3 Q35.3 Q36.3 Q37.3 Q38.3 Q39.3 Q40.3 Q41.3 Q42.3 Q43.3 Q44.3 Q45.3 Q46.3 Q47.3 Q48.3 Q49.3 Q50.3 Q51.3 Q52.3 Q53.3 Q54.3 Q55.3 Q56.3 Q57.3 Q58.3 Q59.3 Q.1 R10.1 R12.1 R22.2 R161.1 R170.2 R171.2 R172.2 R173.2 REMOTE.2 ST_LINK.3 SW.1 U0.4 U1.8 U1.23 U1.35 U1.47 U2.2 U3.1 | length 1021.4
  Bottom Layer w10: v1(3385,1705) 3395,1695 3395,1625 3413.94,1606.06 Q29.3@3427.6,1606.06 ; U1.8@5453.58,764.53 5529.53,764.53 v1(5555,790) ; U1.47@5526.42,573.58 5526.42,721.42 5545,740 v1(5570,740) ; v1(5680,815) 5703.58,838.58 U1.23@5703.58,896.42 ; U1.35@5776.42,646.42 6173.58,646.42 6200,620 ST_LINK.3@6200,560
H0.0: Q00.2 R48.2
  other v2: 1077.16,1727.16
H0.1: Q01.2 R47.1
  other v2: 1735.7,1783.59
H0.2: Q02.2 R40.2
  other v2: 1832.4,1601.06
H0.3: Q03.2 R41.2
  other v2: 1826.76,1401.19
H0.4: Q04.2 R42.2
  other v2: 1733.59,1219.3
H0.5: Q05.2 R43.2
  other v2: 1566.06,1107.6
H0.6: Q06.2 R44.2
  other v2: 1361.19,1088.24
H0.7: Q07.2 R45.2
  other v2: 1169.3,1166.41
H0.8: Q08.2 R46.2
  other v2: 1047.6,1323.94
H0.9: Q09.2 R54.1
  other v2: 1003.24,1538.81
H1.0: Q10.2 R63.2
  other v2: 2101.41,1730.7
H1.1: Q11.2 R62.1
  other v2: 2755.7,1778.59
H1.2: Q12.2 R55.2
  other v2: 2847.4,1606.06
H1.3: Q13.2 R56.2
  other v2: 2851.76,1396.19
H1.4: Q14.2 R57.2
  other v2: 2758.59,1214.3
H1.5: Q15.2 R58.2
  other v2: 2591.06,1097.6
H1.6: Q16.2 R59.2
  other v2: 2386.19,1078.24
H1.7: Q17.2 R60.2
  other v2: 2194.3,1156.41
H1.8: Q18.2 R61.2
  other v2: 2072.6,1318.94
H1.9: Q19.2 R69.1
  other v2: 2028.24,1533.81
H2.0: Q20.2 R78.2
  other v2: 3491.41,1725.7
H2.1: Q21.2 R77.1
  other v2: 4130.7,1788.59
H2.2: Q22.2 R70.2
  other v2: 4227.4,1616.06
H2.3: Q23.2 R71.2
  other v2: 4236.76,1411.19
H2.4: Q24.2 R72.2
  other v2: 4138.59,1224.3
H2.5: Q25.2 R73.2
  other v2: 3971.06,1107.6
H2.6: Q26.2 R74.2
  other v2: 3766.19,1088.24
H2.7: Q27.2 R75.2
  other v2: 3564.3,1161.41
H2.8: Q28.2 R76.2
  other v2: 3437.6,1313.94
H2.9: Q29.2 R82.1
  other v2: 3408.24,1533.81
H3.0: Q30.2 R91.2
  other v2: 4502.16,1737.16
H3.1: Q31.2 R90.1
  other v2: 5157.16,1782.84
H3.2: Q32.2 R83.2
  other v2: 5259.81,1613.03
H3.3: Q33.2 R84.2
  other v2: 5265.19,1398.03
H3.4: Q34.2 R85.2
  other v2: 5167.84,1222.84
H3.5: Q35.2 R86.2
  other v2: 5008.03,1110.19
H3.6: Q36.2 R87.2
  other v2: 4798.03,1084.81
H3.7: Q37.2 R88.2
  other v2: 4592.84,1162.16
H3.8: Q38.2 R89.2
  other v2: 4480.19,1316.97
H3.9: Q39.2 R97.1
  other v2: 4439.81,1541.97
H4.0: Q40.2 R106.2
  other v2: 5877.16,1752.16
H4.1: Q41.2 R105.1
  other v2: 6532.16,1787.84
H4.2: Q42.2 R98.2
  other v2: 6629.81,1618.03
H4.3: Q43.2 R99.2
  other v2: 6635.19,1418.03
H4.4: Q44.2 R100.2
  other v2: 6542.84,1237.84
H4.5: Q45.2 R101.2
  other v2: 6378.03,1120.19
H4.6: Q46.2 R102.2
  other v2: 6163.03,1094.81
H4.7: Q47.2 R103.2
  other v2: 5977.84,1177.16
H4.8: Q48.2 R104.2
  other v2: 5845.19,1336.97
H4.9: Q49.2 R110.1
  other v2: 5809.81,1556.97
H5.0: Q50.2 R119.2
  other v2: 6907.16,1737.16
H5.1: Q51.2 R118.1
  other v2: 7552.16,1782.84
H5.2: Q52.2 R111.2
  other v2: 7654.81,1608.03
H5.3: Q53.2 R112.2
  other v2: 7665.19,1413.03
H5.4: Q54.2 R113.2
  other v2: 7572.84,1222.84
H5.5: Q55.2 R114.2
  other v2: 7403.03,1105.19
H5.6: Q56.2 R115.2
  other v2: 7188.03,1084.81
H5.7: Q57.2 R116.2
  other v2: 6987.84,1162.16
H5.8: Q58.2 R117.2
  other v2: 6870.19,1326.97
H5.9: Q59.2 R124.1
  other v2: 6829.81,1536.97
LED0.B: LED0.1 R51.2 | length 399.1
  Top Layer w10: v2(1260,1910.63) 1355,1815.63 1355,1565 LED0.1@1345,1555
LED0.G: LED0.3 R53.2 | length 728.4
  Top Layer w10: v2(1050,1910.63) 1050,1790 1005,1745 1005,1695 1035,1665 1108.64,1665 1248.64,1525 1248.64,1456.36 1285,1420 LED0.3@1345,1420
LED0.R: LED0.2 R52.2 | length 546.3
  Top Layer w10: v2(1155,1910.63) 1184.37,1910.63 1240,1855 1240,1700 1275,1665 1275,1505 1290,1490 LED0.2@1342.5,1490
LED1.B: LED1.1 R66.2 | length 379.6
  Top Layer w10: v2(2325,1910.63) 2325,1773.64 2380,1718.64 2380,1575 LED1.1@2365,1560
LED1.G: LED1.3 R68.2 | length 726.6
  Top Layer w10: v2@2114.37,1910 v2(2115,1910.63) 2115,1845 2035,1765 2035,1705 2170,1570 2230,1570 2280,1520 2280,1450 2305,1425 LED1.3@2365,1425
LED1.R: LED1.2 R67.2 | length 500.2
  Top Layer w10: v2(2220,1910.63) 2220,1910 2270,1860 2270,1691.36 2300,1661.36 2300,1520 2327.5,1492.5 LED1.2@2365,1492.5
LED2.B: LED2.1 R79.2 | length 404.5
  Top Layer w10: v2(3645,1910.63) 3645,1845 3775,1715 LED2.1@3775,1560